# EAGLE board LED eyes (EAGLE 7.6.0)

Size 73.58 x 164.99 mm. Coordinates in mm from the lower left corner, seen from the top.
Outline: 0,0 56.82,0 56.82,53.33 0,53.33 0,0
Copper layers (1*16): Top 0.035mm / dielectric 1.5mm / Bottom 0.035mm
Design rules "default": minimum track width 10mil, minimum drill 24mil, track to track 8mil, track to pad 8mil, pad to pad 8mil, via to via 8mil, smd to smd 8mil, copper to edge 40mil, drill to drill 8mil, minimum pad ring 10mil, minimum via ring 8mil, stop-mask expansion 4mil, vias tented up to drill 0mil, thermal gap 10mil

## Footprints (pad centres in the part's own frame; a part is rotated, then mirrored left to right if it is on the bottom)
DC-POWER = drill 0.889 pad 2.54 octagon: + 0,2.54; - 0,-2.54
RADIAL-D11.36MM = drill 1.27 pad 1.905 square: + -2.54,0 | drill 1.27 pad 1.905: - 2.54,0
LED5MM = drill 0.813 octagon: A -1.27,0; K 1.27,0
0207/10 = drill 0.813 octagon: 1 -5.08,0; 2 5.08,0
B25V = drill 0.813 long: A 2.54,0.635; E -2.54,0.635; S 0,0.635
TO92 = drill 0.813 octagon: 1 1.27,0; 2 0,1.905; 3 -1.27,0
TO220 = drill 1.118 long: 1 -2.54,-6.35; 2 0,-6.35; 3 2.54,-6.35 | hole 3.302: 0,11.176
ARDUINO_UNO = drill 1.016 pad 1.88: 0 63.5,50.8; 1 60.96,50.8; 2 58.42,50.8; 3 55.88,50.8; 3.3V 35.56,2.54; 4 53.34,50.8; 5 50.8,50.8; 5V 38.1,2.54; 6 48.26,50.8; 7 45.72,50.8; 8 41.656,50.8; 9 39.116,50.8; 10 36.576,50.8; 11 34.036,50.8; 12 31.496,50.8; 13 28.956,50.8; A0 50.8,2.54; A1 53.34,2.54; A2 55.88,2.54; A3 58.42,2.54; A4 60.96,2.54; A5 63.5,2.54; AREF 23.876,50.8; GND 26.416,50.8; GND. 43.18,2.54; GND.. 40.64,2.54; I/OREF 30.48,2.54; N/C 27.94,2.54; RESET 33.02,2.54; SCL 18.796,50.8; SDA 21.336,50.8; VIN 45.72,2.54 | hole 3.2: 66.04,7.62; 66.04,35.56; 15.24,50.8; 13.97,2.54

## Placement (x,y rotation side)
BAT1  [DC-POWER]  5,35.48 0 top
C1  0.33uF  [RADIAL-D11.36MM]  5,48.18 0 top
C2  0.11uF  [RADIAL-D11.36MM]  5,98.98 0 top
D1  [LED5MM]  5,22.78 0 top
D3  [LED5MM]  5,162.48 0 top
Meter1  [DC-POWER]  5,86.28 0 top
Meter2  [DC-POWER]  5,175.18 0 top  (outside the outline)
R1  500‎Ω  [0207/10]  5,60.88 0 top
R2  20‎Ω  [0207/10]  5,124.38 0 top
R3  300‎Ω  [0207/10]  5,149.78 0 top
Rpot3  125‎Ω  [B25V]  5,73.58 0 top
T3  [TO92]  5,137.08 0 top
U1  [TO220]  5,10.08 0 top
U2  [ARDUINO_UNO]  5,111.68 0 top

## Library data of the parts
BAT1 C1 C2 D1 D3 Meter1 Meter2 R1-R3 Rpot3 T3 U1 U2 = AUTODESK_CIRCUITS_BREADBOARD

## Nets
N$1: C2.+ Meter1.+ R1.1 R2.1 U1.3
N$2: R1.2 Rpot3.A U1.2
N$3: Rpot3.E
N$4: BAT1.+ C1.+ U1.1 U2.VIN
N$5: BAT1.- C1.- C2.- Meter1.- Rpot3.S T3.1 U2.GND
N$6: D1.A R2.2
N$7: R3.2 T3.2
N$8: R3.1 U2.13
N$9: D1.K D3.A
N$10: D3.K Meter2.+
N$11: Meter2.- T3.3

## Tracks (layer width: path | path; a pad name or v marks a point on that pad's centre or on a via)
N$1  (4 unrouted)
N$2  (2 unrouted)
N$4  (3 unrouted)
N$5  (6 unrouted)
N$6  (1 unrouted)
N$7  (1 unrouted)
N$8  (1 unrouted)
N$9  (1 unrouted)
N$10  (1 unrouted)
N$11  (1 unrouted)